# Altium PCB PCB1.PcbDoc
Units mil, origin at the board's own origin, x right, y up, seen from the top; angles counter-clockwise.
Board outline 6000 x 4000 mil, 2 copper layers (Top Layer, Bottom Layer); 16 components, 11 nets, 90 pads, 26 vias.
Unrouted connection lines stored in the file: 1.
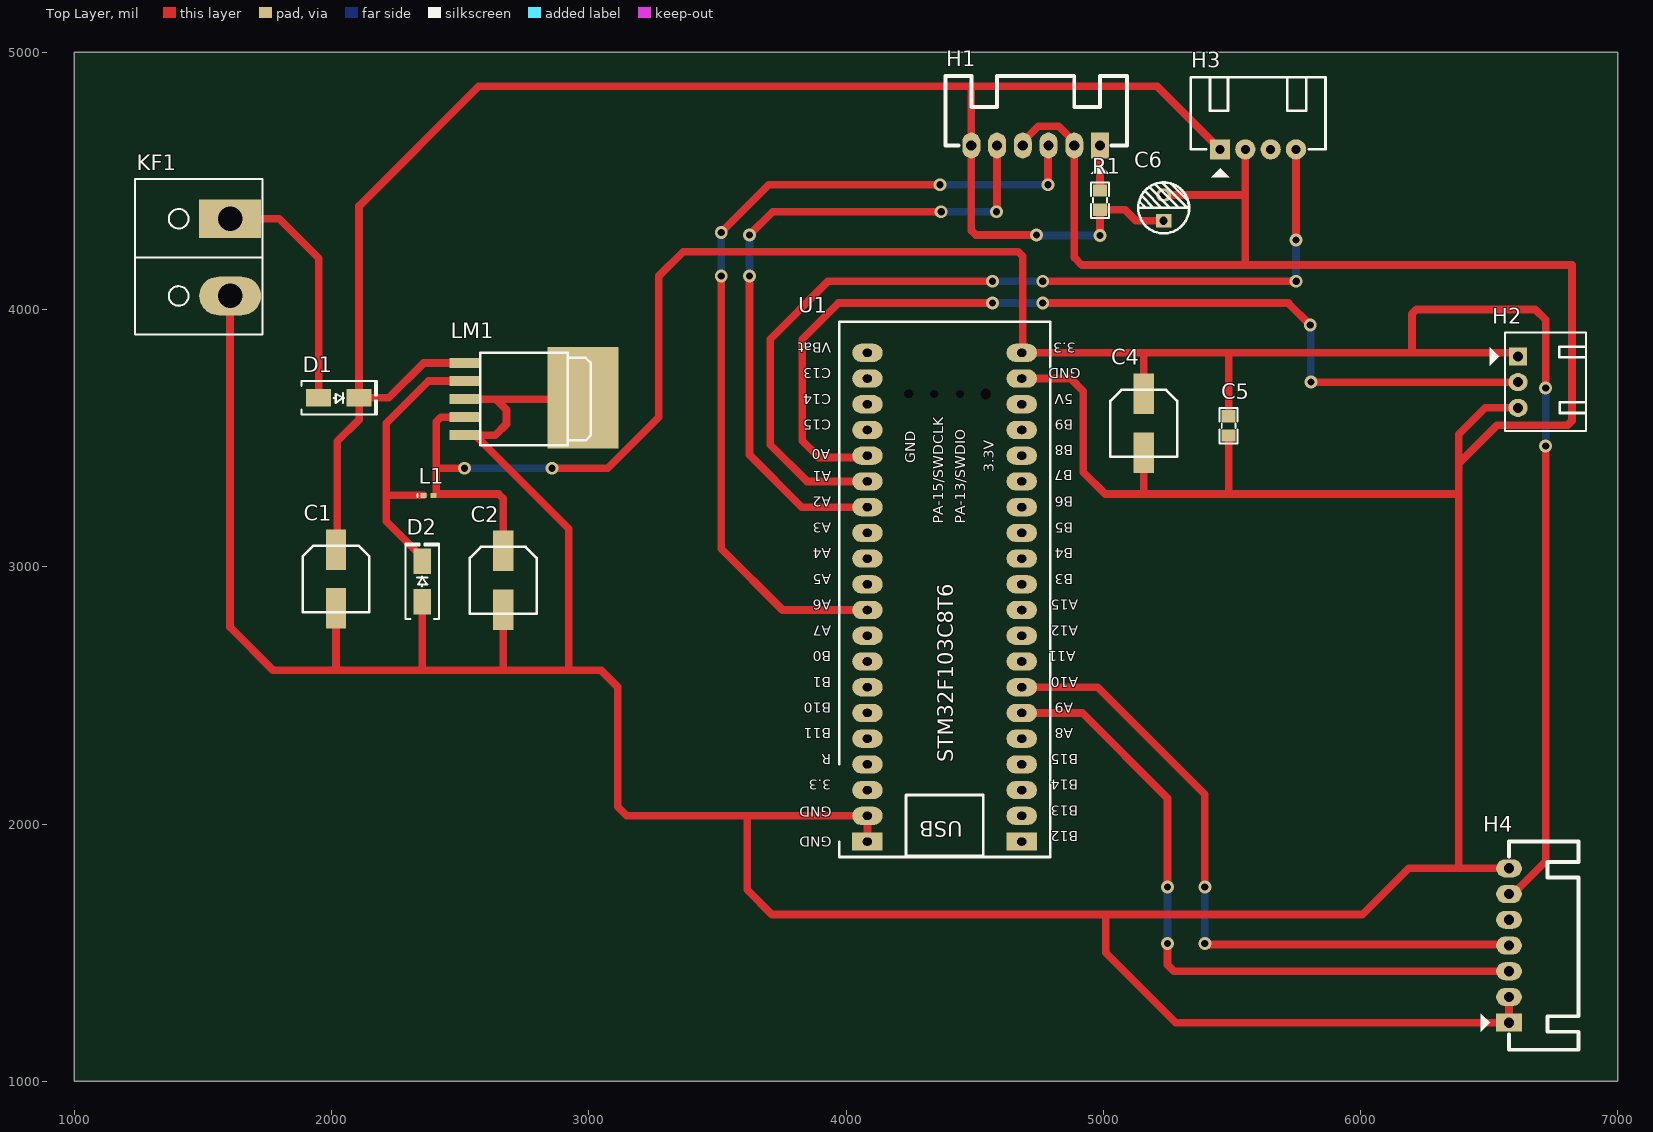
[diagram p0: Top Layer view]
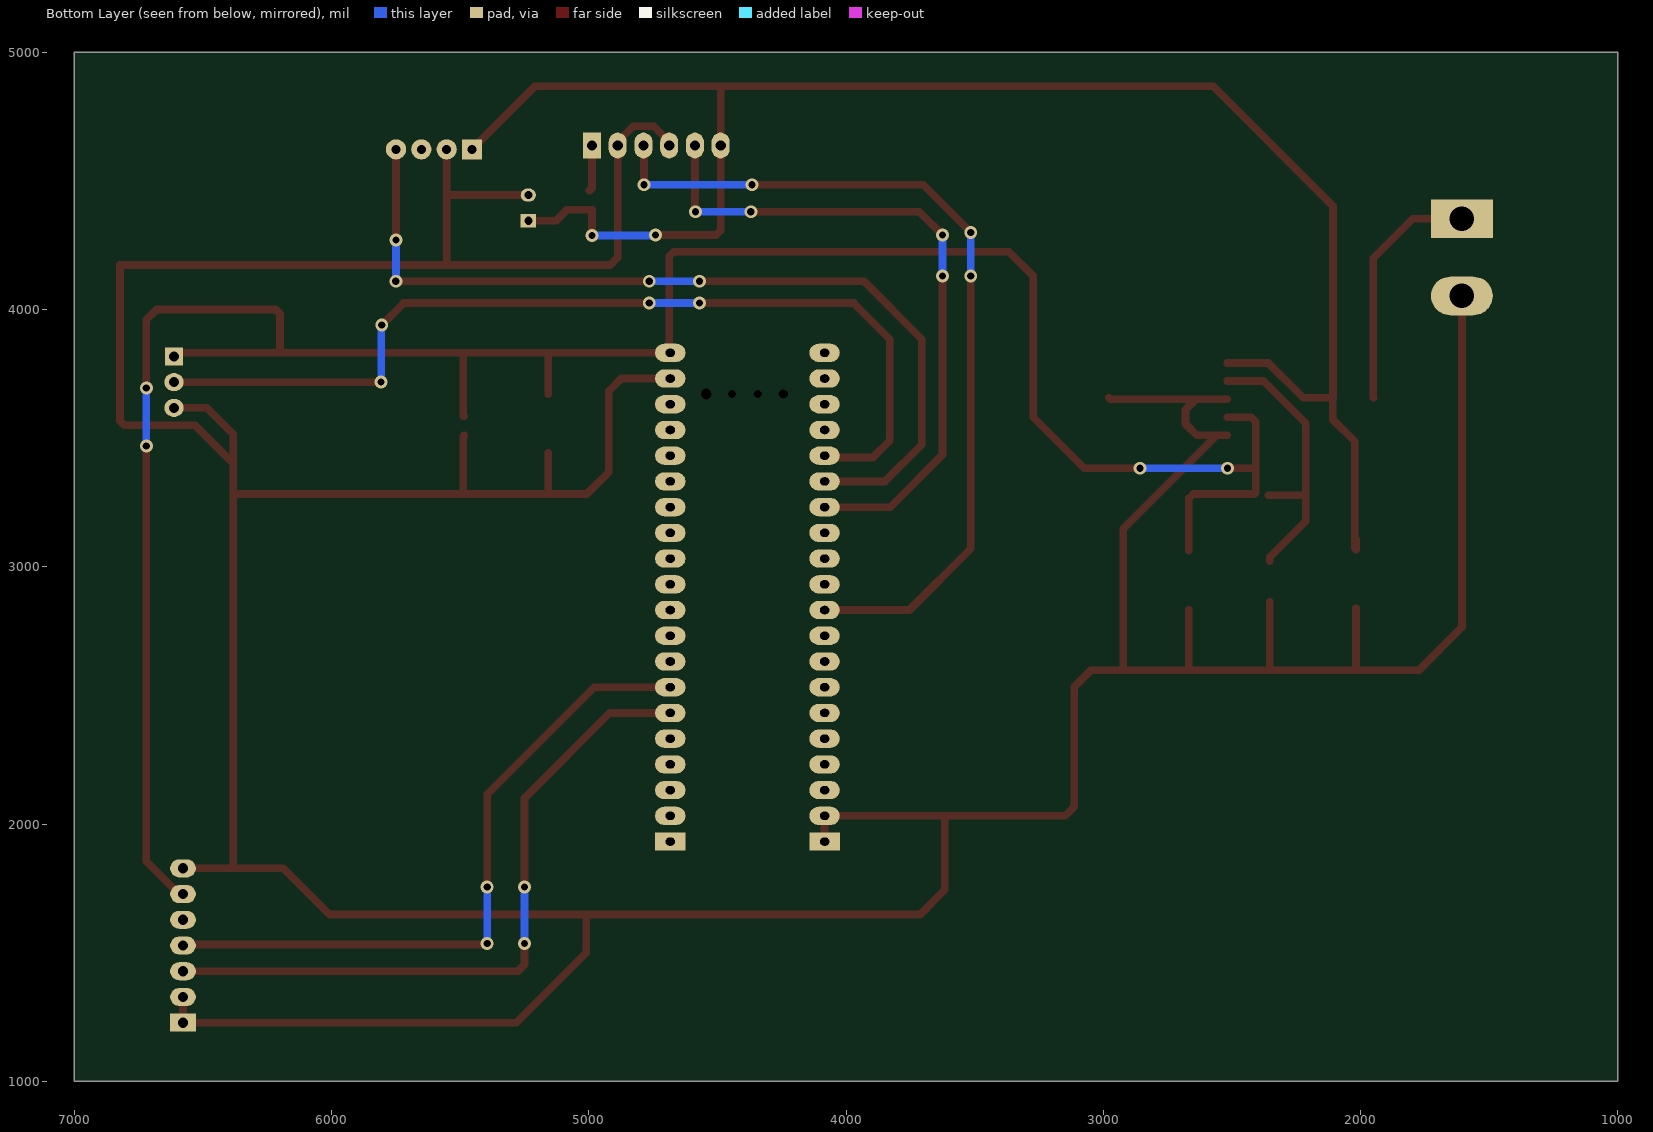
[diagram p1: Bottom Layer view, seen from below]
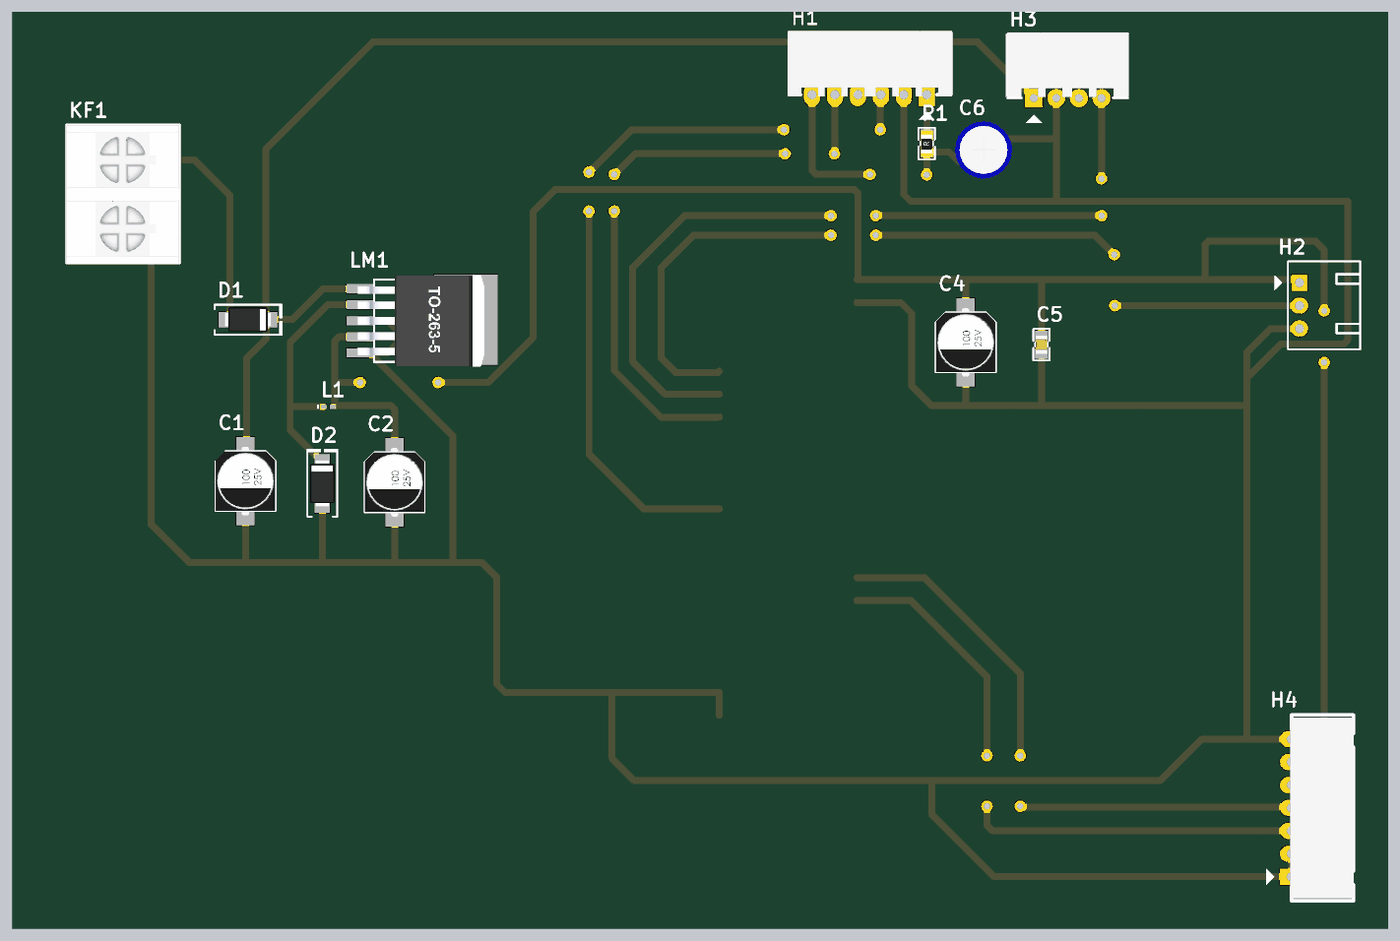
[diagram p2: 3D render of the assembled board from above, using the file's embedded part models]

## Layer stack, top to bottom
Top Solder: solder mask 0.4, Solder Resist, Dk 3.5
Top Layer: signal copper 1.4
Dielectric 1: dielectric 12.6, FR-4, Dk 4.8
Bottom Layer: signal copper 1.4
Bottom Solder: solder mask 0.4, Solder Resist, Dk 3.5

## Board outline
1000,1000 7000,1000 7000,5000 1000,5000

## Design rules (kind name [scope] priority, off if disabled: settings)
Clearance [All] p1: gap=10 ignorepadtopadclearanceinfootprint=FALSE
PolygonConnect [All] p1: connectstyle=Relief reliefconductorwidth=10 reliefentries=4 polygonreliefangle="90 Angle" airgapwidth=10
RoomDefinition Sheet1 [InComponentClass('Sheet1')] p1: confinementstyle=ConfineIn formatcopy=TRUE lockcomponents=FALSE outline 990.86,1047.94 6990.86,1047.94 6990.86,5011.75 990.86,5011.75
RoutingVias [All] p1: holewidth=28 width=35 viastyle="Through Hole" minholewidth=28 minwidth=35 maxholewidth=28 maxwidth=35
SolderMaskExpansion [All] p1: expansion=4
Width [All] p1: maxlimit=40 minlimit=20 preferedwidth=30
30 further rules are at their usual default settings.

## Components (designator, comment, footprint, x,y, rotation, side; value= is the part's Value field where it differs from the comment)
C1 "470uF" "tu nhom 6.3 (d)" 2017.39,2952.57 r270 top
C2 "470uF" "tu nhom 6.3 (d)" 2667.39,2947.57 r270 top
C4 "47uF" "tu nhom 6.3 (d)" 5157.39,3557.77 r270 top
C5 "104" "tu 0805" 5487.39,3547.77 r90 top
C6 "220uF" "tu hoa 5mm" 5235,4395 r90 top
D1 "SS34" "DIODE SMA" 2028.22,3656.75 r0 top
D2 "SS34" "DIODE SMA" 2352.39,2942.57 r90 top
H1 "Header 6P 2.54" "Header 6P DC 2.54" 4987.39,4637.57 r90 top
H2 "Header 3P" "Header 3P DC 2.54" 6612.39,3817.77 r0 top
H3 "Header 4P 2.54" "Header 4P DC 2.54" 5454.97,4623.57 r90 top
H4 "Header 7P" "Header 7P DC 2.54" 6577.39,1227.53 r0 top
KF1 "CON 2 KF7.62" "CON 2 KF7.62" 1605.65,4350.74 r270 top
L1 "Inductor" 0402-A 2377.39,3277.57 r0 top value=10mH
LM1 "LM2576 3.3V SMD" TO263-5 2748.22,3651.75 r270 top
R1 "150R" "tro smd 0805" 4985,4425 r90 top
U1 "Stm32f103C8T6" PCBComponent_1 4481.53,6014.25 r90 top

## Footprints (in the part's own frame and the unit in brackets; to place one, negate y for a bottom-side part, rotate by r counter-clockwise, add the part's x,y. Pads: shape width x height; smd on the part's side, far side on the other; paste and mask are expansions set on the pad)
0402-A [mm] "Chip Inductor, Body 1.0x0.5mm, IPC High Density"
  rect 0.6x0.5 smd: 1(-0.5,0) 2(0.5,0)
  silkscreen extent -1.1,-0.15 -1.1,0.15, body extent -0.55,-0.3 0.55,0.3, height 0.55
"CON 2 KF7.62" [mil]
  rect 150x240 hole 95: 1(-2,0)
  oval 150x240 hole 95: 2(298,0)
  silkscreen extent -157,-370 448,126, body extent -152,-370 448,122, height 493
"DIODE SMA" [mm] "SMA"
  rect 2.5x1.7 smd: 1(-2,0) 2(2,0)
  silkscreen extent -3.68,-1.65 3.75,1.65, body extent -2.6,-1.37 2.6,1.37, height 2.4
"Header 3P DC 2.54" [mil]
  rect 70x70 hole 39.37 unplated: 1(0,0)
  oval 75x70 hole 39.37 unplated: 2(0,-100) 3(0,-200)
  silkscreen extent -110,-290 265,93
"Header 4P DC 2.54" [mil]
  rect 78.74x78.74 hole 35: 1(-1,1)
  round 78.74 hole 35: 2(-1,-97.42) 3(-1,-195.85) 4(-1,-294.27)
  silkscreen extent -110,-409 280,115, body extent 5,-413 278,123, height 290
"Header 6P DC 2.54" [mil]
  rect 100x70 hole 40: 1(0,0)
  oval 100x70 hole 40: 2(0,100) 3(0,200) 4(0,300) 5(0,400) 6(0,500)
  silkscreen extent -110,-105 270,600, body extent -7,-110 278,605, height 227
"Header 7P DC 2.54" [mil]
  rect 100x70 hole 40: 1(0,0.04)
  oval 100x70 hole 40: 2(0,100.04) 3(0,200.04) 4(0,300.04) 5(0,400.04) 6(0,500.04) 7(0,600.04)
  silkscreen extent -110,-105 270,705, body extent -5,-94 271,694, height 237
PCBComponent_1 [mm]
  rect 1.8x3 hole 0.8 slot 0.905 at 90 deg paste+0 mask+0.051: 1(-103.696,-5.123) 40(-103.696,10.117)
  oval 1.8x3 hole 0.8 slot 0.905 at 90 deg paste+0 mask+0.051: 2(-101.156,-5.123) 3(-98.616,-5.123) 4(-96.076,-5.123) 5(-93.536,-5.123) 6(-90.996,-5.123) 7(-88.456,-5.123) 8(-85.916,-5.123) 9(-83.376,-5.123) 10(-80.836,-5.123) 11(-78.296,-5.123) 12(-75.756,-5.123) 13(-73.216,-5.123) 14(-70.676,-5.123) 15(-68.136,-5.123) 16(-65.596,-5.123) 17(-63.056,-5.123) 18(-60.516,-5.123) 19(-57.976,-5.123) 20(-55.436,-5.123) 21(-55.436,10.117) 22(-57.976,10.117) 23(-60.516,10.117) 24(-63.056,10.117) 25(-65.596,10.117) 26(-68.136,10.117) 27(-70.676,10.117) 28(-73.216,10.117) 29(-75.756,10.117) 30(-78.296,10.117) 31(-80.836,10.117) 32(-83.376,10.117) 33(-85.916,10.117) 34(-88.456,10.117) 35(-90.996,10.117) 36(-93.536,10.117) 37(-96.076,10.117) 38(-98.616,10.117) 39(-101.156,10.117)
  round 0.1 hole 1.082 paste+0 mask+0.051: 41(-59.5,-1.567)
  round 0.1 hole 0.8 paste+0 mask+0.051: 42(-59.5,0.973) 43(-59.5,3.513)
  round 0.1 hole 0.8 slot 0.905 at 90 deg paste+0 mask+0.051: 44(-59.5,6.053)
  silkscreen extent -105.22,-7.92 -52.39,12.91
TO263-5 [mil] "TO263-5"
  rect 39.37x120 smd: 1(-140,-230) 2(-70,-230) 3(0,-230) 4(70,-230) 5(140,-230)
  rect 393.7x275.59 smd: 6(-5,230)
  silkscreen extent -180,-170 180,260, body extent -200,-242 200,310, height 180
"tro smd 0805" [mm]
  rect 1.2x1.4 smd: 1(-0.946,-0.061) 2(0.954,-0.061)
  silkscreen extent -1.75,-0.97 1.75,0.84, body extent -1.56,-0.76 1.44,0.64, height 0.53
"tu 0805" [mm] "Compoment SMD 80x50mil"
  rect 1.2x1.4 smd: 1(-0.946,-0.003) 2(0.954,-0.003)
  silkscreen extent -1.75,-0.89 1.75,0.89, body extent -1.01,-0.64 1.01,0.63, height 0.61
"tu hoa 5mm" [mm]
  rect 1.3x1.5 hole 0.8: 1(-1.27,0)
  oval 1.3x1.5 hole 0.8: 2(1.27,0)
  silkscreen extent -2.51,-2.51 2.51,2.51, body extent -3.12,-3.18 3.23,3.18, height 14.55
"tu nhom 6.3 (d)" [mm]
  rect 4x2 smd: 1(-2.9,0) 2(2.9,0)
  silkscreen extent -3.3,-3.3 3.3,3.3, body extent -3.8,-3.3 3.8,3.3, height 8

## Part data
C1 C2 C4: library part "Tu Nhom 47uF 25V", "Dán", Chung_Loai=Dán, Don_Vi=Con, Ma_Hang=MH002216, So_Chan=2, Ten_Linh_Kien="T? Nhôm 47uF 25V 6.3x5.5MM"
C5: library part "Tu 0805 104 50V 10%", "Dán", Chung_Loai=Dán, Don_Vi=Con, Ma_Hang=MH004551, So_Chan=2, Ten_Linh_Kien="T? 0805 104-100nF 10% 50V"
C6: library part "Tu Hoa 220uF 10V 6x11", "C?m", Chung_Loai=C?m, Don_Vi=Con, Ma_Hang=MH004510, So_Chan=2, Ten_Linh_Kien="T? Hóa 220uF 10V 6x11MM"
D1 D2: library part "Diode SS34 ( 1N5822 )", "Dán", Chung_Loai=Dán, Don_Vi=Con, Ma_Hang=MH002104, Ten_Linh_Kien="Diode SS34 3A 40V SMA ( 1N5822 SS34A)"
H1: library part "Header 6P 2.54 Duc Cong", "C?m", Chung_Loai=C?m, Don_Vi=Con, Ma_Hang=MH003363, Ten_Linh_Kien="Header 6P XH2.54-6P Ð?c Cong"
H2: library part "Header 3P 2.54 Duc Cong", "C?m", Chung_Loai=C?m, Don_Vi=Con, Ma_Hang=MH001302, Ten_Linh_Kien="Header 3P XH2.54-3P Ð?c Cong"
H3: library part "Header 4P 2.54 Duc Cong", "C?m", Chung_Loai=C?m, Don_Vi=Con, Ma_Hang=MH001310, Ten_Linh_Kien="Header 4P XH2.54-4P Ð?c Cong"
H4: library part "Header 7P 2.54 Duc Cong", "C?m", Chung_Loai=C?m, Don_Vi=Con, Ma_Hang=MH004118, Ten_Linh_Kien="Header 7P XH2.54-7P Ð?c Cong"
KF1: "C?m", Chung_Loai=C?m, Don_Vi=Con, Ma_Hang=MH002053, Ten_Linh_Kien="CON 2 KF7.62-2P 7.62MM (Ðen Th?ng)"
LM1: "Dán", Chung_Loai=Dán, Don_Vi=Con, Ma_Hang=MH001260, Ten_Linh_Kien="LM2576S-3.3V BUCK 3.3V 3A TO263-5"
R1: library part "Tro 0805 5% 150R", "Dán", Chung_Loai=Dán, Don_Vi=Con, Ma_Hang=MH005255, So_Chan=2, Ten_Linh_Kien="Tr? 0805 5% 150R"
U1: library part Stm32F103C8T6
L1: Code_IEC=1005, Code_JEITA=0402, LatestRevisionDate=29-May-2009, LatestRevisionNote="IPC-7351 Footprint Added.", PackageDescription="Chip Inductor", PackageReference=0402-A, Published=8-Jun-2000, Publisher="Altium Limited"

## Via types
v1: diameter 50, hole 28, Top Layer to Bottom Layer, 26 vias

## Nets (pads, with @x,y where several pads share a name; then routed paths per layer and width w, separated by ;. In a path a pad name is that pad's centre, name@x,y a point inside that pad or via, vN(x,y) a via of type N, cw(c..) or ccw(c..) an arc to the next point about the centre after c; other vN are vias at no path point)
3.3V: C2.1 C4.1 C5.2 H2.1 H4.6 L1.2 LM1.4 U1.20 | length 9553.1
  Top Layer w30: v1(2517.39,3382.77) 2412.39,3382.77 2407.39,3387.77 ; LM1.4 2424.97,3581.75 2407.39,3564.17 2407.39,3387.77 ; C2.1 2667.39,3265 2649.82,3282.57 2412.39,3282.57 2407.39,3287.57 2407.39,3387.77 ; v1(2857.39,3382.77) 3074.24,3382.77 3272.39,3580.92 3272.39,4130.2 3367.2,4225 4669.82,4225 4687.39,4207.43 4687.39,3835.92 U1.20 5157.39,3831.75 ; C4.1 5157.39,3831.75 ; C5.2@5483.59,3585.35 C5.2 5487.53,3831.61 5487.39,3831.75 ; H4.6 6592.39,1727.57 6720,1855.18 v1(6720,3470) ; H2.1 6598.42,3831.75 6207.39,3831.75 ; v1@6716.17,3698.83 v1(6720,3695) 6720,3960 6680,4000 6217.57,4000 6200,3982.43 6200,3839.14 6207.39,3831.75 ; 5157.39,3831.75 5487.39,3831.75 ; 5487.39,3831.75 6207.39,3831.75
  Bottom Layer w30: v1(2517.39,3382.77) v1(2857.39,3382.77) ; v1(6720,3470) v1(6720,3695)
5V: C1.1 C6.1 D1.1 D1.2 H1.6 H3.1 KF1.1 LM1.1 R1.1 | length 7904.7
  Top Layer w30: KF1.1 1796.4,4352.74 1950.55,4198.59 1950.55,3657.82 D1.1 ; C1.1@2017.39,3106.12 C1.1 2022.39,3071.75 2022.39,3487.57 2107.39,3572.57 2107.39,3656.31 D1.2 ; LM1.1 2357.39,3791.75 2222.39,3656.75 D1.2 ; v1(4740,4290) 4504.97,4290 4487.39,4307.57 H1.6 4487.39,4867.57 ; v1(4987.39,4288.15) R1.1 5084.52,4387.77 5127.29,4345 C6.1 ; H3.1 5208.97,4867.57 4487.39,4867.57 ; D1.2 2106.96,4402.14 2572.39,4867.57 4487.39,4867.57
  Bottom Layer w30: v1(4740,4290) 4741.85,4288.15 v1(4987.39,4288.15)
A0: H2.2 U1.25 | length 3774.5
  Top Layer w30: U1.25 4076.47,3425 3895,3425 3830,3490 3830,3885 3970,4025 v1(4570,4025) ; v1(4765,4025) 5720,4025 v1(5805,3940) ; v1(5807.23,3717.77) H2.2
  Bottom Layer w30: v1(4570,4025) v1(4765,4025) ; v1(5805,3940) 5807.23,3937.77 v1(5807.23,3717.77)
A1: H3.4 U1.26 | length 3501.8
  Top Layer w30: U1.26 3848.25,3331.75 3705,3475 3705,3885 3930,4110 v1(4570,4110) ; v1(4765,4110) v1(5750,4110) ; v1@5750,4270 v1(5749.24,4270.76) H3.4 H3.4@5750.75,4621.07
  Bottom Layer w30: v1(4570,4110) v1(4765,4110) ; v1(5749.24,4270.76) 5749.24,4110.76 v1(5750,4110)
A2: H1.5 U1.27 | length 2653.3
  Top Layer w30: v1(3625,4130) 3625,3435 3828.25,3231.75 U1.27 ; v1(3625,4290) 3715,4380 v1(4370,4380) ; v1(4585,4380) 4587.39,4382.39 H1.5
  Bottom Layer w30: v1(3625,4130) v1(3625,4290) ; v1(4370,4380) v1(4585,4380)
A6: H1.3 U1.31 | length 3397.1
  Top Layer w30: v1(3515,4130) 3515,3070 3753.25,2831.75 U1.31 ; v1(3515,4300) 3700,4485 v1(4365,4485) ; v1(4785,4485) 4785,4635.18 H1.3
  Bottom Layer w30: v1(3515,4130) v1(3515,4300) ; v1(4365,4485) v1(4785,4485)
GND: C1.2 C2.2 C4.2 C5.1 C6.2 D2.1 H1.2 H1.4 H2.3 H3.2 H4.1 H4.2 H4.7 KF1.2 LM1.3 LM1.5 LM1.6 U1.19 U1.39 U1.40 | length 21275.7
  Top Layer w30: KF1.2 1605.65,2764.32 1772.39,2597.57 2012.39,2597.57 ; C1.2 2017.39,2602.57 2012.39,2597.57 ; D2.1 2352.39,2602.57 2347.39,2597.57 ; LM1.5 LM1.5@2558.53,3511.75 ; LM1.3 2638.25,3651.75 ; C2.2 2667.39,2602.57 2662.39,2597.57 ; LM1.6 2973.22,3651.75 2638.25,3651.75 ; U1.40 U1.39 3615.72,2031.75 ; U1.19 4873.42,3731.75 4922.39,3682.77 4922.39,3367.77 5007.39,3282.77 5157.39,3282.77 ; H1.4 4687.39,4652.57 4747.39,4712.57 4827.39,4712.57 4887.39,4652.57 H1.2 4887.39,4202.61 4917.23,4172.77 5550,4172.77 ; C4.2 5157.39,3282.77 ; C6.2 5552.39,4445 ; C5.1@5483.59,3510.54 5487.39,3506.74 5487.39,3287.77 5482.39,3282.77 ; H3.2 5552.39,4445 ; H4.2 H4.1 5282.43,1227.57 5010,1500 5010,1637.77 5000,1647.77 ; H4.7 6382.29,1827.57 ; H2.3 6485.09,3617.77 6382.29,3514.97 6382.29,3401.37 ; 2012.39,2597.57 2347.39,2597.57 ; 2347.39,2597.57 2662.39,2597.57 ; LM1.5@2558.53,3511.75 2636.75,3511.75 2680,3555 2680,3610 2638.25,3651.75 ; LM1.5@2558.53,3511.75 2922.39,3147.89 2922.39,2597.57 ; 2662.39,2597.57 2922.39,2597.57 ; 2922.39,2597.57 3047.39,2597.57 3112.39,2532.57 3112.39,2067.57 3148.22,2031.75 3615.72,2031.75 ; 3615.72,2031.75 3615.72,1744.45 3712.39,1647.77 5000,1647.77 ; 5000,1647.77 6007.39,1647.77 6187.2,1827.57 6382.29,1827.57 ; 5157.39,3282.77 5482.39,3282.77 ; 5482.39,3282.77 6377.29,3282.77 6382.29,3287.77 ; 5550,4172.77 6822.43,4172.77 6822.43,3567.57 6804.85,3550 6530.92,3550 6382.29,3401.37 ; 5550,4172.77 5552.39,4175.17 5552.39,4445 ; 6382.29,1827.57 6382.29,3287.77 ; 6382.29,3287.77 6382.29,3401.37
NetD2_2: D2.2 L1.1 LM1.2 | length 1113.4
  Top Layer w30: D2.2 2352.39,3037.06 2212.39,3177.06 2212.39,3277.57 ; L1.1 2212.39,3277.57 ; LM1.2 2376.57,3721.75 2212.39,3557.57 2212.39,3277.57
NetH1_1: H1.1 R1.2 | length 179.9
  Top Layer w30: H1.1 4987.39,4471.2 4996.02,4462.57 R1.2@4997.39,4462.57
Rx: H4.4 U1.7 | length 2649.9
  Top Layer w30: U1.7 4978.25,2531.75 5395,2115 v1(5395,1755) ; v1(5395,1535) 5398.71,1531.29 6573.68,1531.29 H4.4
  Bottom Layer w30: v1(5395,1535) v1(5395,1755)
Tx: H4.3 U1.6 | length 2689.4
  Top Layer w30: U1.6 4918.25,2431.75 5250,2100 v1(5250,1755) ; v1(5250,1535) 5250,1452.57 5275,1427.57 H4.3
  Bottom Layer w30: v1(5250,1535) v1(5250,1755)
pads on no net: H3.3 H4.5 U1.1 U1.2 U1.3 U1.4 U1.5 U1.8 U1.9 U1.10 U1.11 U1.12 U1.13 U1.14 U1.15 U1.16 U1.17 U1.18 U1.21 U1.22 U1.23 U1.24 U1.28 U1.29 U1.30 U1.32 U1.33 U1.34 U1.35 U1.36 U1.37 U1.38 U1.41 U1.42 U1.43 U1.44

## Text inside footprints (layer, text, board x,y; h text height)
U1: Top Overlay "B7" at 4881.53,3374.25 h39.37 r180; Top Overlay "STM32F103C8T6" at 4416.52,2239.27 h60 r90; Top Overlay "3.3V" at 4573.66,3367.12 h39.37 r90; Top Overlay "GND" at 4268.66,3402.12 h39.37 r90; Top Overlay "USB" at 4453.16,2011.32 h59.05 r180; Top Overlay "B12" at 4903.2,1971.45 h39.37 r180; Top Overlay "B13" at 4903.2,2071.45 h39.37 r180; Top Overlay "B14" at 4903.2,2171.45 h39.37 r180; Top Overlay "B15" at 4903.2,2271.45 h39.37 r180; Top Overlay "A8" at 4883.19,2371.47 h39.37 r180; Top Overlay "A9" at 4883.19,2471.46 h39.37 r180; Top Overlay "A10" at 4903.2,2571.45 h39.37 r180; Top Overlay "A11" at 4893.2,2671.46 h39.37 r180; Top Overlay "A12" at 4903.2,2771.45 h39.37 r180; Top Overlay "A15" at 4903.2,2871.45 h39.37 r180; Top Overlay "B3" at 4883.2,2971.46 h39.37 r180; Top Overlay "B4" at 4883.2,3071.46 h39.37 r180; Top Overlay "B5" at 4883.2,3171.46 h39.37 r180; Top Overlay "B6" at 4883.2,3271.45 h39.37 r180; Top Overlay "B8" at 4883.2,3471.45 h39.37 r180; Top Overlay "B9" at 4883.2,3571.45 h39.37 r180; Top Overlay "5V" at 4883.2,3671.45 h39.37 r180; Top Overlay "GND" at 4913.2,3771.45 h39.37 r180; Top Overlay "3.3" at 4893.2,3871.45 h39.37 r180; Top Overlay "GND" at 3943.66,1951.38 h39.37 r180; Top Overlay "GND" at 3943.66,2066.38 h39.37 r180; Top Overlay "3.3" at 3943.22,2171.44 h39.37 r180; Top Overlay "R" at 3943.22,2271.44 h39.37 r180; Top Overlay "B11" at 3943.21,2371.45 h39.37 r180; Top Overlay "B10" at 3943.22,2471.44 h39.37 r180; Top Overlay "B1" at 3943.22,2571.44 h39.37 r180; Top Overlay "A0" at 3938.66,3456.38 h39.37 r180; Top Overlay "B0" at 3943.21,2671.44 h39.37 r180; Top Overlay "A7" at 3943.22,2771.44 h39.37 r180; Top Overlay "A6" at 3943.22,2871.44 h39.37 r180; Top Overlay "A5" at 3943.22,2971.44 h39.37 r180; Top Overlay "A4" at 3943.22,3071.44 h39.37 r180; Top Overlay "A3" at 3943.22,3171.44 h39.37 r180; Top Overlay "A2" at 3943.22,3271.44 h39.37 r180; Top Overlay "A1" at 3943.22,3371.44 h39.37 r180; Top Overlay "C15" at 3943.22,3571.44 h39.37 r180; Top Overlay "C14" at 3943.22,3671.44 h39.37 r180; Top Overlay "C13" at 3943.22,3771.44 h39.37 r180; Top Overlay "VBat" at 3943.22,3871.44 h39.37 r180; Top Overlay "PA-13/SWDIO" at 4463.64,3167.14 h39.37 r90; Top Overlay "PA-15/SWDCLK" at 4378.64,3167.14 h39.37 r90